# Altium PCB PCB1.PcbDoc
Units mil, origin at the board's own origin, x right, y up, seen from the top; angles counter-clockwise.
Board outline 1000 x 1690.08 mil, 2 copper layers (Top Layer, Bottom Layer); 53 components, 56 nets, 190 pads, 83 vias.
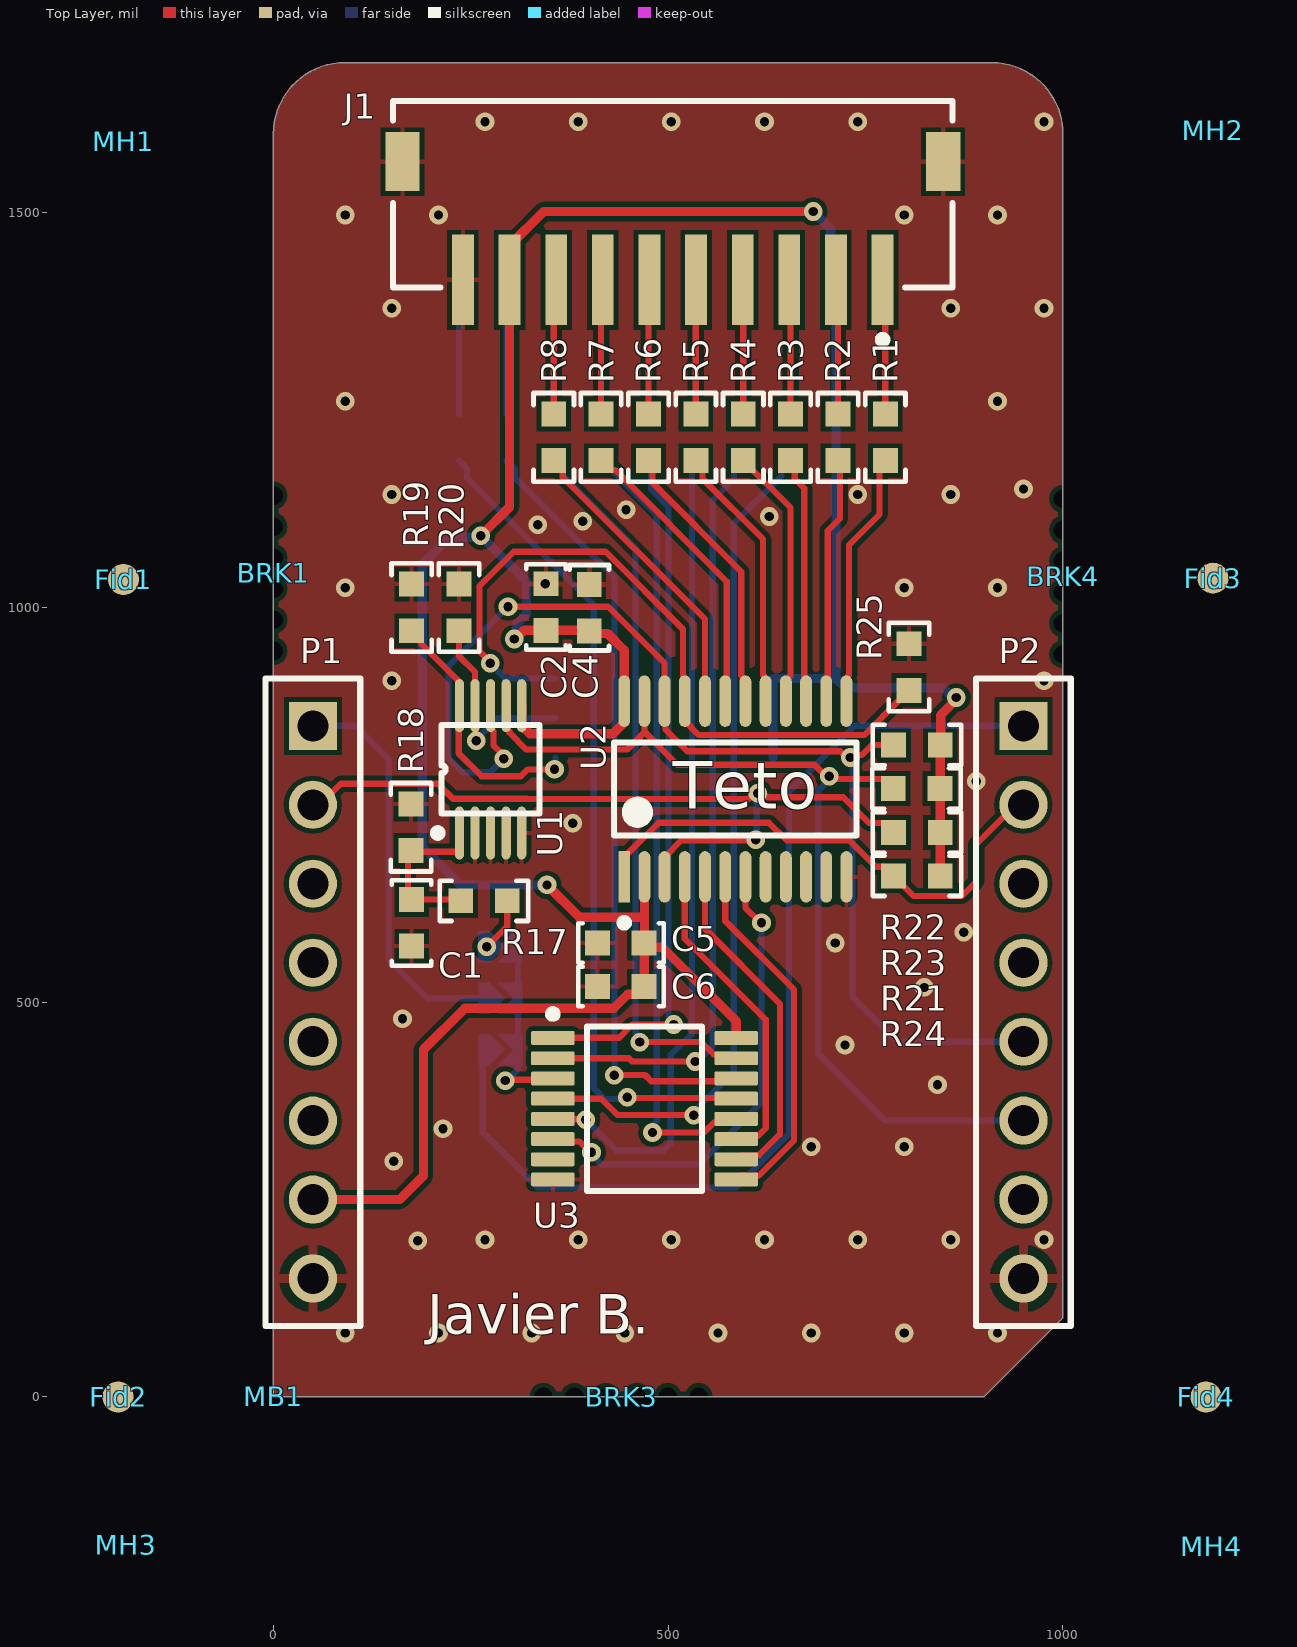
[diagram p0: Top Layer view]
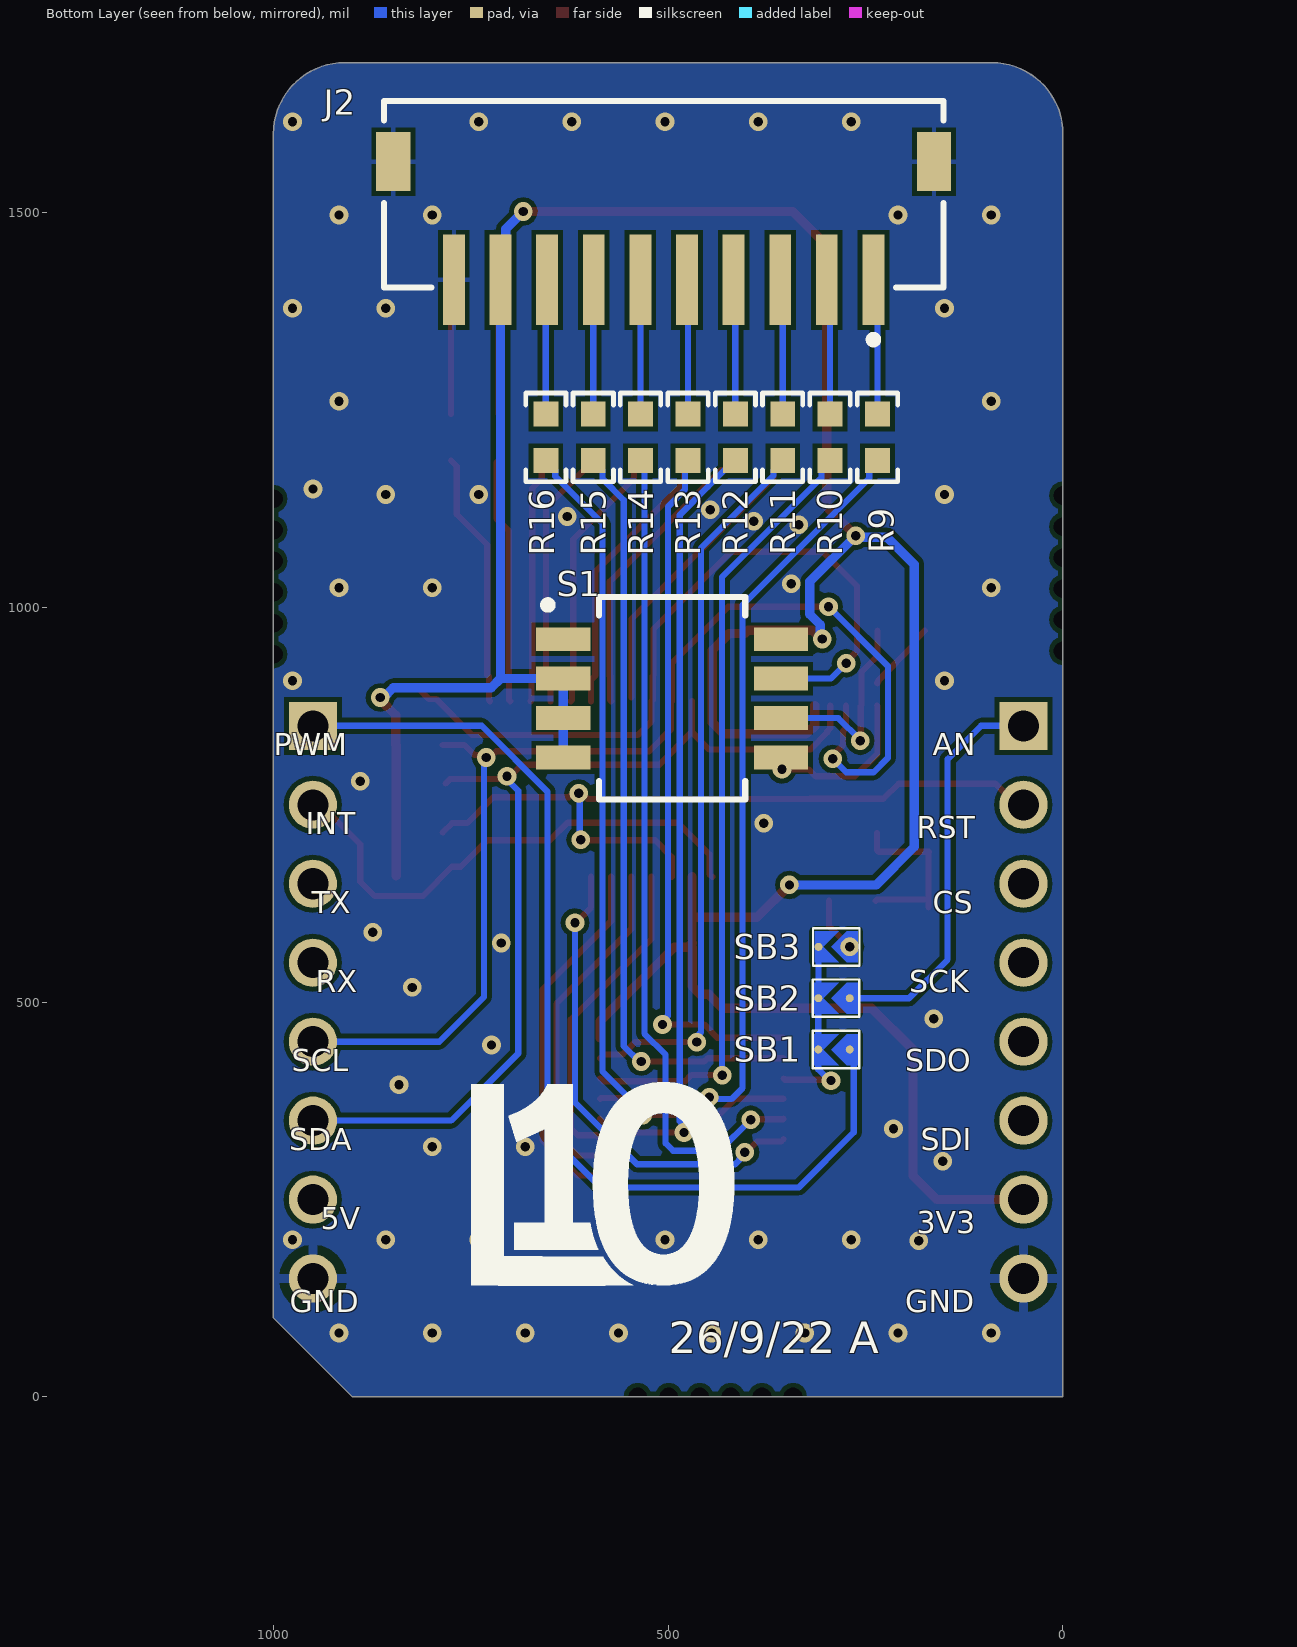
[diagram p1: Bottom Layer view, seen from below]

## Layer stack, top to bottom
Top Solder: solder mask 0.4, Solder Resist, Dk 3.5
Top Layer: signal copper 1.4
Dielectric 1: dielectric 12.6, FR-4, Dk 4.8
Bottom Layer: signal copper 1.4
Bottom Solder: solder mask 0.4, Solder Resist, Dk 3.5

## Board outline
0,0 0,1600 cw(c90.08,1600) 90.08,1690.08 909.92,1690.08 cw(c909.92,1600) 1000,1600 1000,100 900,0

## Design rules (kind name [scope] priority, off if disabled: settings)
BoardOutlineClearance BoardOutlineClearance_silk [OnLayer('Top Overlay')] p1: gap=0 ignorepadtopadclearanceinfootprint=FALSE
BoardOutlineClearance BoardOutlineClearance_silk2 [OnLayer('Bottom Overlay')] p2: gap=0 ignorepadtopadclearanceinfootprint=FALSE
BoardOutlineClearance [All] p3: gap=0 ignorepadtopadclearanceinfootprint=FALSE
Clearance [All] p1: gap=5.91 ignorepadtopadclearanceinfootprint=FALSE
DiffPairsRouting [All] p1: maxlimit=4.92 minlimit=4.92 mostfreqgap=4.92 toplayer_minwidth=4.92 toplayer_maxwidth=4.92 toplayer_prefwidth=4.92 bottomlayer_minwidth=4.92 bottomlayer_maxwidth=4.92 bottomlayer_prefwidth=4.92 maxuncoupledlength=590.55
HoleSize [All] p1: absolutevalues=TRUE maxlimit=196.85 minlimit=7.87 maxpercent=80.000 minpercent=20.000
HoleToHoleClearance [All] p1: gap=11.81 allowstackedmicrovias=TRUE
MinimumSolderMaskSliver [All] p1: minsoldermaskwidth=2.95
PlaneClearance [All] p1: clearance=19.68
PlaneConnect [All] p1: pad.planeconnectstyle=Relief pad.reliefexpansion=20 pad.reliefentries=4 pad.reliefconductorwidth=10 pad.reliefairgap=5.91 via.planeconnectstyle=Direct via.reliefexpansion=20 via.reliefentries=4 via.reliefconductorwidth=10 via.reliefairgap=10
PolygonConnect [All] p1: thpad.connectstyle=Relief thpad.reliefconductorwidth=11.81 thpad.reliefentries=4 thpad.polygonreliefangle="90 Angle" thpad.airgapwidth=11.81 smdpad.connectstyle=Relief smdpad.reliefconductorwidth=5.91 smdpad.reliefentries=4 smdpad.polygonreliefangle="90 Angle" smdpad.airgapwidth=5.91 via.connectstyle=Direct via.reliefconductorwidth=10 via.reliefentries=4 via.polygonreliefangle="90 Angle" via.airgapwidth=10
RoutingVias [All] p1: holewidth=11.81 width=23.62 viastyle="Through Hole" minholewidth=11.81 minwidth=23.62 maxholewidth=27.56 maxwidth=47.24
SilkToSilkClearance [All] p1: silktosilkclearance=0
SilkToSolderMaskClearance [IsPad] p1: minsilkscreentomaskgap=0 clearancetoexposedcopper=TRUE
SolderMaskExpansion [All] p1: expansion=4 istentingtop=FALSE
SupplyNets "Schematic Supply Nets_1" [InNet('GND')] p1: voltage=0.000
SupplyNets "Schematic Supply Nets" [InNet('3v3')] p2: voltage=0.000
Width [All] p1: maxlimit=196.85 minlimit=5.91 preferedwidth=7.87
22 further rules are at their usual default settings.

## Classes and differential pairs
net class S[0..7]: S0 S1 S2 S3 S4 S5 S6 S7
net class "P1 [0..7]": "P1 0" "P1 1" "P1 2" "P1 3" "P1 4" "P1 5" "P1 6" "P1 7"
net class "P0 [0..2]": "P0 0" "P0 1" "P0 2"
component class U_TMUX130: C6 U3
component class U_PCAL64: C4 C5 R21 R22 R23 R24 R25 U2
component class U_MKicroBUS: MB1 P1 P2
component class U_MCP3423: C1 C2 R17 R18 R19 R20 U1
component class U_CONN: J1 J2 R1 R2 R3 R4 R5 R6 R7 R8 R9 R10 R11 R12 R13 R14 R15 R16
component class BUS: BRK1 BRK3 BRK4 Fid1 Fid2 Fid3 Fid4 MH1 MH2 MH3 MH4 S1 SB1 SB2 SB3

## Components (designator, comment, footprint, x,y, rotation, side; value= is the part's Value field where it differs from the comment)
BRK1 "DNP" BK_CRACK1B_M 0,944.88 r270 top value="Mouse Bites 2mm"
BRK3 "DNP" BK_CRACK1B_M 538.74,0 r0 top value="Mouse Bites 2mm"
BRK4 "DNP" BK_CRACK1B_M 1000,1137.48 r90 top value="Mouse Bites 2mm"
C1 "CAP CER 100nF 50V 0603" C_1608[0603] 175,600.47 r270 top value=100nF
C2 "CAP CER 100nF 50V 0603" C_1608[0603] 345,1000.47 r270 top value=100nF
C4 "CAP CER 100nF 50V 0603" C_1608[0603] 400,999.53 r270 top value=100nF
C5 "CAP CER 100nF 50V 0603" C_1608[0603] 440,575 r0 top value=100nF
C6 "CAP CER 100nF 50V 0603" C_1608[0603] 440,520 r0 top value=100nF
Fid1 "DNP" FD_Fiducial -190,1035.49 r0 top value="Fiducial mark"
Fid2 "DNP" FD_Fiducial -196.85,0 r90 top value="Fiducial mark"
Fid3 "DNP" FD_Fiducial 1190,1036.99 r90 top value="Fiducial mark"
Fid4 "DNP" FD_Fiducial 1181.1,0 r90 top value="Fiducial mark"
J1 "HC-ZH-10PWT" J_S10B-ZR-SM4 505.75,1523.27 r180 top locked
J2 "HC-ZH-10PWT" J_S10B-ZR-SM4 505.75,1523.27 r0 bottom
MB1 "mikroBUS" mikroBUS-Midi-No-Connector 0,0 r0 top locked
MH1 "DNP" MP_M-Hole_M2-NonPlated -190,1590 r0 top value="Mounting Hole 2mm non plated"
MH2 "DNP" MP_M-Hole_M2-NonPlated 1190,1604.41 r90 top value="Mounting Hole 2mm non plated"
MH3 "DNP" MP_M-Hole_M2-NonPlated -187.32,-187.46 r90 top value="Mounting Hole 2mm non plated"
MH4 "DNP" MP_M-Hole_M2-NonPlated 1188.03,-189.5 r90 top value="Mounting Hole 2mm non plated"
P1 "ESQ-108-14-T-S" CONN_SKT_01X08_100MIL-ELEVATED-LONGPIN 50,500 r270 top locked
P2 "ESQ-108-14-T-S" CONN_SKT_01X08_100MIL-ELEVATED-LONGPIN 950,500 r270 top locked
R1 "Res 1k 1% 0603" R_1608[0603] 775,1215.47 r270 top value=1k
R2 "Res 1k 1% 0603" R_1608[0603] 715,1215.47 r270 top value=1k
R3 "Res 1k 1% 0603" R_1608[0603] 655,1215.47 r270 top value=1k
R4 "Res 1k 1% 0603" R_1608[0603] 595,1215.47 r270 top value=1k
R5 "Res 1k 1% 0603" R_1608[0603] 535,1215.47 r270 top value=1k
R6 "Res 1k 1% 0603" R_1608[0603] 475,1215.47 r270 top value=1k
R7 "Res 1k 1% 0603" R_1608[0603] 415,1215.47 r270 top value=1k
R8 "Res 1k 1% 0603" R_1608[0603] 355,1215.47 r270 top value=1k
R9 "Res 1k 1% 0603" R_1608[0603] 235,1215.47 r270 bottom value=1k
R10 "Res 1k 1% 0603" R_1608[0603] 295,1215.47 r270 bottom value=1k
R11 "Res 1k 1% 0603" R_1608[0603] 355,1215.47 r270 bottom value=1k
R12 "Res 1k 1% 0603" R_1608[0603] 415,1215.47 r270 bottom value=1k
R13 "Res 1k 1% 0603" R_1608[0603] 475,1215.47 r270 bottom value=1k
R14 "Res 1k 1% 0603" R_1608[0603] 535,1215.47 r270 bottom value=1k
R15 "Res 1k 1% 0603" R_1608[0603] 595,1215.47 r270 bottom value=1k
R16 "Res 1k 1% 0603" R_1608[0603] 655,1215.47 r270 bottom value=1k
R17 "Res 1k 1% 0603" R_1608[0603] 266.65,628.4 r180 top value=1k
R18 "Res 1k 1% 0603" R_1608[0603] 174.08,721.58 r90 top value=1k
R19 "Res 10k 1% 0603" R_1608[0603] 175,1000 r90 top value=10k
R20 "Res 10k 1% 0603" R_1608[0603] 235,1000 r90 top value=10k
R21 "Res 10k 1% 0603" R_1608[0603] 815,715 r180 top value=10k
R22 "Res 10k 1% 0603" R_1608[0603] 815.1,825.71 r180 top value=10k
R23 "Res 10k 1% 0603" R_1608[0603] 814.63,770.71 r180 top value=10k
R24 "Res 10k 1% 0603" R_1608[0603] 815,660 r180 top value=10k
R25 "Res 10k 1% 0603" R_1608[0603] 805,924.53 r90 top value=10k
S1 "DSHP04TSGER" S_DIP_SWITCH_50MIL_4POS 495,885 r270 bottom value="DIP Switch 4pos"
SB1 "Open" SB-TINY-OPEN 290,440 r0 bottom
SB2 "Open" SB-TINY-OPEN 290,505 r0 bottom
SB3 "Open" SB-TINY-OPEN 289.84,570 r0 bottom
U1 "MCP3423-E/UN" U_MSOP50P300X500-10(RM-10)_WO-TP 275,795 r0 top
U2 "PCAL6416APW,118" U_TSSOP24_SOT355-1-IPC_B 585,770 r0 top locked
U3 "TMUX1308PWR" U_TSSOP65P500X450-16 470,365 r270 top locked

## Footprints (in the part's own frame and the unit in brackets; to place one, negate y for a bottom-side part, rotate by r counter-clockwise, add the part's x,y. Pads: shape width x height; smd on the part's side, far side on the other; paste and mask are expansions set on the pad)
BK_CRACK1B_M [mm] "Cracker métrique NPTH"
  round 0 hole 0.6 unplated: 1(0,0) 2(-1,0) 3(-2,0) 4(-3,0) 5(-4,0) 6(-5,0)
C_1608[0603] [mm] "Capacitor MLCC; Body 1.6 x 0.8 mm (LxW typ)"
  rect 0.8x0.8 smd: 1(-0.75,0) 2(0.75,0)
  silkscreen extent -1.38,-0.64 1.38,0.64, body extent -0.8,-0.4 0.8,0.4, height 0.8
CONN_SKT_01X08_100MIL-ELEVATED-LONGPIN [mm] "SQ Post Socket, 1x8 Pins, Vertical, 2.54mm Pitch, Female"
  rect 1.55x1.55 hole 1: 1(-8.89,0)
  round 1.55 hole 1: 2(-6.35,0) 3(-3.81,0) 4(-1.27,0) 5(1.27,0) 6(3.81,0) 7(6.35,0) 8(8.89,0)
  silkscreen extent -10.41,-1.52 10.42,1.52, body extent -10.66,-1.37 10.66,1.37, height 0.25
FD_Fiducial [mm] "Fiducial"
  round 1 smd paste-0.5 mask+1: 1(0,0)
J_S10B-ZR-SM4 [mm] "CONN HEADER SMD 10POS 1MM5 RA"
  rect 0.7x2.9 smd paste+0 mask+0: 1(-6.75,2.75) 2(-5.25,2.75) 3(-3.75,2.75) 4(-2.25,2.75) 5(-0.75,2.75) 6(0.75,2.75) 7(2.25,2.75) 8(3.75,2.75) 9(5.25,2.75) 10(6.75,2.75)
  rect 1.1x1.9 smd paste+0 mask+0: 11(8.7,-1.05) 12(-8.7,-1.05)
  silkscreen extent -9,-3 9,4.8, body extent -9,-3 9,3.5, height 3.7
mikroBUS-Midi-No-Connector [mil]
MP_M-Hole_M2-NonPlated [mm] "Monting Hole M2 non plated"
  round 1.5 hole 2.5 unplated paste-2539.97: 1(0,0)
R_1608[0603] [mm] "Chip Resistor; Body 1.6 x 0.8 mm (LxW typ)"
  rect 0.8x0.8 smd: 1(-0.75,0) 2(0.75,0)
  silkscreen extent -1.43,-0.65 1.43,0.65, body extent -0.77,-0.42 0.78,0.43, height 0.45
S_DIP_SWITCH_50MIL_4POS [mm] "Dip switch 4pos, pitch 1.27mm, height 1.55mm"
  rect 0.76x1.75 smd paste+0 mask+0: 1(-1.903,-3.5) 2(-0.633,-3.5) 3(0.637,-3.5) 4(1.907,-3.5) 5(1.907,3.5) 6(0.637,3.5) 7(-0.633,3.5) 8(-1.903,3.5)
  silkscreen extent -3.25,-4.13 3.26,2.35, body extent -3.15,-3.35 3.16,3.35, height 1.95
SB-TINY-OPEN [mil]
  round 10 smd paste-10 mask+0.04: 1(-19.84,0)
  round 10 smd paste-10.08 mask+0.04: 2(19.84,0)
  Top Layer region: -30.16,-19.68 -30.16,19.68 -15.91,19.68 3.78,0 -15.91,-19.68
  Top Layer region: -6.06,19.68 13.62,0 -6.06,-19.68 24.84,-19.68 24.84,19.68
  silkscreen extent -32,-24 27,24
U_MSOP50P300X500-10(RM-10)_WO-TP [mm] "Shrink Small Outline; 10 Leads; Body Width 3 mm; Pitch 0.5 mm"
  oval 0.3x1.7 smd mask+0.05: 1(-1,-2.05) 2(-0.5,-2.05) 3(0,-2.05) 4(0.5,-2.05) 5(1,-2.05) 6(1,2.05) 7(0.5,2.05) 8(0,2.05) 9(-0.5,2.05) 10(-1,2.05)
  silkscreen extent -1.82,-2.17 1.58,1.43, body extent -1.6,-2.58 1.6,2.57, height 1.09
U_TSSOP24_SOT355-1-IPC_B [mm]
  rect 0.381x1.655 smd paste+0 mask+0: 1(-3.575,-2.825)
  rrect100% 0.381x1.655 smd paste+0 mask+0: 2(-2.925,-2.825) 3(-2.275,-2.825) 4(-1.625,-2.825) 5(-0.975,-2.825) 6(-0.325,-2.825) 7(0.325,-2.825) 8(0.975,-2.825) 9(1.625,-2.825) 10(2.275,-2.825) 11(2.925,-2.825) 12(3.575,-2.825) 13(3.575,2.825) 14(2.925,2.825) 15(2.275,2.825) 16(1.625,2.825) 17(0.975,2.825) 18(0.325,2.825) 19(-0.325,2.825) 20(-0.975,2.825) 21(-1.625,2.825) 22(-2.275,2.825) 23(-2.925,2.825) 24(-3.575,2.825)
  silkscreen extent -3.9,-4.43 3.9,1.5, body extent -4.15,-3.9 4.15,3.9, height 0.25
U_TSSOP65P500X450-16 [mm] "SOP, 16-Leads, Body 5x4.5mm, Pitch 0.65mm, IPC Medium Density"
  rrect22% 0.45x1.4 smd: 1(-2.275,-2.95) 2(-1.625,-2.95) 3(-0.975,-2.95) 4(-0.325,-2.95) 5(0.325,-2.95) 6(0.975,-2.95) 7(1.625,-2.95) 8(2.275,-2.95) 9(2.275,2.95) 10(1.625,2.95) 11(0.975,2.95) 12(0.325,2.95) 13(-0.325,2.95) 14(-0.975,2.95) 15(-1.625,2.95) 16(-2.275,2.95)
  silkscreen extent -3.17,-3.07 2.65,1.85, body extent -3,-4.35 3,4.35, height 0.25

## Part data
BRK1 BRK3 BRK4: library part BK_BREAKOUT_2MM, "Mouse Bites", Mounting Technology=N/A
C1 C2 C4 C5 C6: library part CAP002, "Capacitor type 1", Dielectric=X7R, Manufacturer 1=Yageo, Manufacturer Part Number 1=CC0603KRX7R9BB104, Rated Voltage=50V, Supplier Part Number 1=C14663, Tolerance=10%, Code CEGEP=COND0143SM, LibRef=CAP002, Mounting Technology=SMT, Supplier 1=LCSC
Fid1 Fid2 Fid3 Fid4: library part Fiducial, "Fiducial mark for alignement and Pick&Place", Mounting Technology=N/A
J1 J2: library part CONN-1MM5-01X10-S10B-H-SMT, "CONN wire to board SMT R/A 10POS 1.5mm", Manufacturer 1=HCTL, Manufacturer 2=JST, Manufacturer Part Number 2=S10B-ZR-SM4A-TF(LF)(SN), Supplier Part Number 1=C2845432, Manufacturer Part Number 1=HC-ZH-10PWT, Mounting Technology=SMT, Supplier 1=LCSC, Supplier 2=LCSC, Supplier 3=Digikey, Supplier Part Number 2=C5149249, Supplier Part Number 3=455-1700-1-ND
MB1: library part "mikroBUS compatible add-on board", "mikroBUS compatible add-on board"
MH1 MH2 MH3 MH4: library part MH-2MM_NP, "Mounting Hole 2mm non plated", Supplier Part Number 1=N/A, Manufacturer Part Number 1=DNP, Mounting Technology=N/A
P1 P2: library part CONN-100MIL-SKT-01X08_ELEVATED_LONGPIN, "CONN SOCKET 8pos 100mils Elevated", Manufacturer 1=Samtec, Supplier Part Number 1=SAM9303-ND, Manufacturer Part Number 1=ESQ-108-14-T-S, Mounting Technology=TH, Supplier 1=Digikey
R1 R2 R3 R4 R5 R6 R7 R8 R9 R10 R11 R12 R13 R14 R15 R16 R17 R18: library part RES015, "Resistor type 1", Manufacturer 1=Yageo, Manufacturer Part Number 1=RC0603FR-071KL, Max Working Voltage=75V, Supplier Part Number 1=C22548, Tolerance=1%, LibRef=RES015, Mounting Technology=SMT, Puissance=1/10W, Supplier 1=LCSC
R19 R20 R21 R22 R23 R24 R25: library part RES001, "Resistor type 1", Manufacturer 1=Yageo, Manufacturer Part Number 1=RC0603FR-0710KL, Max Working Voltage=75V, Supplier Part Number 1=C98220, Tolerance=1%, Code CEGEP=RESI0238-0603, LibRef=RES001, Mounting Technology=SMT, Puissance=1/10W, Supplier 1=LCSC
S1: library part SW_DIP_50MIL_4POS, "SWITCH DIP SLIDE SPST 25MA 24V, pitch 1.27mm, height 1.55mm", Manufacturer 1=kangshen, Manufacturer 2=Omron, Manufacturer Part Number 2=A6H-4102-PM, Supplier Part Number 1=C3293144, Manufacturer Part Number 1=DSHP04TSGER, Mounting Technology=SMT, Supplier 1=LCSC, Supplier 2=LCSC, Supplier 3=Digikey, Supplier Part Number 2=C2733274, Supplier Part Number 3=39-A6H-4102-PMCT-ND
SB1 SB2 SB3: library part Solder-Jumper-Open, "Solder Jumper"
U1: library part U_MCP3423-E/UN, "CAN Controller Stand-Alone With SPI, 18-Pin PDIP", Manufacturer 1=Microchip, Supplier Part Number 1=C220864, Manufacturer Part Number 1=MCP3423-E/UN, Mounting Technology=SMT, Supplier 1=LCSC, Supplier 2=Digikey, Supplier Part Number 2=MCP3423-E/UN-ND
U2: library part U_PCAL6416APW, "IC I/O EXPANDER 16BIT 24TSSOP", Manufacturer 1="Texas Instruments", Manufacturer 2="NXP Semiconductors", Manufacturer Part Number 1=TCA6416APWR, Supplier Part Number 1=C130203, Manufacturer Part Number 2=PCAL6416APW,118, Mounting Technology=SMT, Supplier 1=LCSC, Supplier 2=LCSC, Supplier 3=Digikey, Supplier Part Number 2=C2652299, Supplier Part Number 3=568-9922-1-ND
U3: library part U_TMUX1308PWR, "IC MUX 8:1 195OHM 16TSSOP", Manufacturer 1=TI, Supplier Part Number 1=C970231, Manufacturer Part Number 1=TMUX1308PWR, Mounting Technology=SMT, Supplier 1=LCSC, Supplier 2=Digikey, Supplier Part Number 2=296-TMUX1308PWRCT-ND

## Via types
v1: diameter 23.62, hole 11.81, Top Layer to Bottom Layer, tented both sides, 83 vias

## Nets (pads, with @x,y where several pads share a name; then routed paths per layer and width w, separated by ;. In a path a pad name is that pad's centre, name@x,y a point inside that pad or via, vN(x,y) a via of type N, cw(c..) or ccw(c..) an arc to the next point about the centre after c; other vN are vias at no path point)
3v3: C2.2 C4.2 C5.2 C6.2 J1.9 J2.9 P1.7 R21.1 R22.1 R23.1 R24.1 S1.2 S1.3 S1.4 U1.6 U2.2 U2.24 U3.16 | length 4236.4
  Top Layer w11.81: P1.7 160,250 190,280 190,440 242.44,492.44 431.11,492.44 448.83,510.16 459.68,510.16 C6.2 C5.2@469.53,569.68 ; v1(262.6,1090.77) 299.06,1127.23 299.06,1458.31 342.27,1501.52 v1(683.58,1501.52) ; v1(305.04,959.96) 306.46,959.96 317.44,970.94 C2.2 399.06,970.94 402.95,967.05 422.95,967.05 444.25,945.75 U2.24 444.25,854.25 430,840 325,840 318.83,846.17 317.39,846.17 314.35,849.21 U1.6 ; v1(346.49,648.53) 387.49,607.53 469.84,607.53 ; C5.2 474.85,569.68 492.47,569.68 586.14,476.01 U3.16 ; C5.2@469.84,580.31 469.84,607.53 ; U2.2 469.84,607.53 ; R24.1 R21.1 844.53,770.34 R23.1 844.63,771.18 R22.1 845,826.07 845,863.38 864.97,883.35 v1(864.97,885.85)
  Bottom Layer w11.81: v1(305.04,959.96) 307.3,962.22 307.3,977.92 320.59,991.21 320.59,1032.79 v1(262.6,1090.77) 260.77,1088.94 222.74,1088.94 188.28,1054.49 188.28,696.72 236.47,648.53 v1(346.49,648.53) ; S1.4 S1.3 S1.2 712.44,909.92 ; v1(683.58,1501.52) 705.81,1479.29 705.81,1421.63 J2.9 712.44,909.92 ; v1(864.97,885.85) 860.71,885.85 848.37,898.18 724.18,898.18 712.44,909.92
AN: P1.1 SB2.1 | length 511.7
  Bottom Layer w7.87: P1.1 103.7,850 146.07,807.63 146.07,553.93 195,505 SB2.1
GND: C1.2 C2.1 C4.1 C5.1 C6.1 J1.10 J1.11 J1.12 J2.10 J2.11 J2.12 P1.8 P2.8 R18.2 R19.2 R20.2 R25.2 U1.2 U1.3 U1.4 U1.5 U2.12 U3.8
  other v1: 91,81 209,81 327,81 445,81 563,81 681,81 799,81 917,81 182.57,197.77 268,199 386,199 504,199 622,199 740,199 858,199 976,199 152.39,298.6 681,317 799,317 214.65,339.49 841.03,395.39 723.83,445.73 163.47,478.98 824.41,518.69 711.65,575 874.41,588.69 378.93,726.77 890,780 150,907 976,907 91,1025 799,1025 917,1025 344.21,1030.09 334.83,1104.85 391.59,1109.33 627.96,1115.21 446.62,1123.72 150,1143 740,1143 858,1143 950,1150 91,1261 917,1261 150,1379 858,1379 976,1379 91,1497 209,1497 799,1497 917,1497 268,1615 386,1615 504,1615 622,1615 740,1615 976,1615
NetC1_1: C1.1 R17.2 R18.1 U1.1 | length 221.3
  Top Layer w7.87: R18.1@170,690.47 170.47,690 C1.1@170.47,620 ; R18.1@170.47,690.47 233.8,690.47 235.61,692.29 U1.1 ; C1.1 235.52,630 R17.2
NetJ1_1: J1.1 R1.1 | length 171.5
  Top Layer w7.87: J1.1 775,1411.5 R1.1
NetJ1_2: J1.2 R2.1 | length 171.1
  Top Layer w7.87: J1.2 715,1412.44 R2.1
NetJ1_3: J1.3 R3.1 | length 170.7
  Top Layer w7.87: J1.3 655,1413.39 R3.1
NetJ1_4: J1.4 R4.1 | length 170.3
  Top Layer w7.87: J1.4 595,1414.33 R4.1
NetJ1_5: J1.5 R5.1 | length 170.1
  Top Layer w7.87: R5.1 535,1414.72 J1.5
NetJ1_6: J1.6 R6.1 | length 170.5
  Top Layer w7.87: R6.1 475,1413.78 J1.6
NetJ1_7: J1.7 R7.1 | length 170.9
  Top Layer w7.87: R7.1 415,1412.83 J1.7
NetJ1_8: J1.8 R8.1 | length 171.3
  Top Layer w7.87: R8.1 355,1411.89 J1.8
NetJ2_1: J2.1 R9.1 | length 172.1
  Bottom Layer w7.87: R9.1 235,1410 J2.1
NetJ2_2: J2.2 R10.1 | length 228.9
  Bottom Layer w7.87: R10.1 295,1410.94 J2.2 299.06,1458.31 J2.2@308.9,1468.15
NetJ2_3: J2.3 R11.1 | length 171.3
  Bottom Layer w7.87: R11.1 355,1411.89 J2.3
NetJ2_4: J2.4 R12.1 | length 170.9
  Bottom Layer w7.87: R12.1 415,1412.83 J2.4
NetJ2_5: J2.5 R13.1 | length 170.5
  Bottom Layer w7.87: R13.1 475,1413.78 J2.5
NetJ2_6: J2.6 R14.1 | length 170.1
  Bottom Layer w7.87: R14.1 535,1414.72 J2.6
NetJ2_7: J2.7 R15.1 | length 170.3
  Bottom Layer w7.87: J2.7 595,1414.33 R15.1
NetJ2_8: J2.8 R16.1 | length 170.7
  Bottom Layer w7.87: J2.8 655,1413.39 R16.1
NetP1_2: P1.2 R21.2 U2.3 | length 983.2
  Top Layer w7.87: P1.2 58.67,750 85.46,776.79 208.21,776.79 227.41,757.59 274.14,757.59 320.88,757.59 320.94,757.53 602.1,757.53 v1@609.13,764.56 ; U2.3 495.43,683.86 516.58,705 610.13,705 v1(610.88,705.75) ; v1(613.39,764.56) 616.41,761.54 623.85,761.54 625.88,759.52 721.73,759.52 754.44,726.81 773.66,726.81 R21.2
  Bottom Layer w7.87: v1(610.88,705.75) 612.14,707 612.14,763.3 v1(613.39,764.56)
NetP1_3: P1.3
NetP1_4: P1.4
NetP1_5: P1.5
NetP1_6: P1.6
NetP2_2: P2.2 R24.2 U2.1 | length 663
  Top Layer w7.87: U2.1 447.81,662.32 447.81,687.41 487.8,727.4 627.6,727.4 650,705 729.25,705 762.75,671.51 773.97,671.51 811.06,634.41 871.76,634.41 890,652.65 890,700 940,750 P2.2
NetP2_3: P2.3
NetP2_4: P2.4
NetP2_5: P2.5 R22.2 U1.8 U2.22 | length 1548.8
  Top Layer w7.87: U1.8 274.98,847.07 278.61,843.45 278.61,825.38 291.51,812.48 v1(291.51,808.22) ; v1(296.97,1001) 424,1001 495.43,929.57 U2.22 496.47,880.19 496.47,845.63 524.29,817.81 717.93,817.81 725.74,810 732.45,810 735.37,812.92 745.23,812.92 758.02,825.71 R22.2
  Bottom Layer w7.87: v1(291.51,808.22) 274.63,791.35 239.83,791.35 221.6,809.58 221.6,925.78 296.82,1001 v1(296.97,1001) ; v1(730.54,809.9) 733.31,807.13 733.31,506.69 790,450 P2.5
NetP2_6: P2.6 R23.2 U1.7 U2.23 | length 1253.5
  Top Layer w7.87: U1.7 294.67,847.07 298.61,843.14 298.61,841.62 320.22,820 447.77,820 470,842.23 ; U2.23 470,881.08 470,842.23 ; v1(704.14,786.21) 699.88,786.21 685.3,800.79 511.44,800.79 470,842.23 ; v1@704.73,782.52 776.42,782.52 R23.2@781.97,776.97
  Bottom Layer w7.87: v1(704.14,786.21) 704.14,781.95 690,767.81 690,435 775,350 P2.6
NetR17_1: R17.1 SB3.1 | length 69.2
  Top Layer w7.87: v1(270,570) 296.18,596.18 R17.1
NetSB1_2: SB1.2 SB2.2 SB3.2 U3.3 | length 236.7
  Top Layer w7.87: v1@295,400 296.69,401.69 352.17,401.69 U3.3
  Bottom Layer w7.87: v1@295,400 309.84,414.84 SB1.2@309.84,439.88 ; SB3.2 309.68,511.06 309.84,511.22 SB2.2 SB1.2
  other v1: 293.73,400.68
NetU2_7: U2.7 U3.6 | length 607.8
  Top Layer w7.87: U3.6 356.84,323.63 387.11,323.63 400.74,310 v1@405,310 ; U2.7 597.8,619.88 616.95,600.73 v1(618.14,600.73)
  Bottom Layer w7.87: v1@405,310 405,305.74 410,300.74 410,300 415.43,294.57 539.57,294.57 618.14,373.14 v1(618.14,600.73)
  other v1: 402.87,310
"P0 0": U2.4 U3.11 | length 403.9
  Top Layer w7.87: U2.4 521.02,580.43 623.54,477.91 623.54,340.41 614.67,331.54 591.06,331.54 U3.11
"P0 1": U2.5 U3.10 | length 433.8
  Top Layer w7.87: U2.5 546.61,592.68 641.55,497.74 641.55,332.83 614.67,305.95 591.06,305.95 U3.10
"P0 2": U2.6 U3.9 | length 463.6
  Top Layer w7.87: U2.6 572.2,602.8 659.36,515.64 659.36,325.04 614.67,280.35 591.06,280.35 U3.9
"P1 0": R1.2 U2.13 | length 325.1
  Top Layer w7.87: U2.13 727.11,882.6 727.11,912.48 729.12,914.5 729.12,1079.12 767.79,1117.79 767.79,1178.74 R1.2
"P1 1": R2.2 U2.14 | length 312.9
  Top Layer w7.87: U2.14 701.52,882.6 701.52,912.72 702.08,913.28 702.08,1097.08 717.51,1112.51 717.51,1183.44 R2.2
"P1 2": R3.2 U2.15 | length 312.8
  Top Layer w7.87: R3.2 660.26,1180.69 660.26,1163 672.35,1150.91 672.35,913.58 673.21,912.72 673.21,882.6 U2.15
"P1 3": R4.2 U2.16 | length 332
  Top Layer w7.87: R4.2 654.92,1126.03 654.92,914.19 648.98,908.25 U2.16
"P1 4": R5.2 U2.17 | length 341.3
  Top Layer w7.87: R5.2 543.43,1177.51 543.43,1163 620.19,1086.24 620.19,914.5 622.02,912.66 622.02,882.6 U2.17
"P1 5": R6.2 U2.18 | length 355.6
  Top Layer w7.87: R6.2 480.12,1180.82 480.12,1157.61 592.44,1045.3 592.44,913.61 597.8,908.25 U2.18
"P1 6": R7.2 U2.19 | length 374.9
  Top Layer w7.87: R7.2 426.81,1174.13 432.74,1174.13 574.08,1032.8 574.08,913.24 573.57,912.72 573.57,882.6 U2.19
"P1 7": R8.2 U2.20 | length 379.1
  Top Layer w7.87: R8.2 366.53,1174.42 366.53,1165.02 546.61,984.93 U2.20@546.61,886.24
PWM: P2.1 SB1.1 | length 1305.2
  Bottom Layer w7.87: 265,430 265,335 334.74,265.26 585.26,265.26 653.07,333.07 653.07,766.87 736.2,850 P2.1
S0: R9.2 U3.13 | length 1053.5
  Top Layer w7.87: v1(448.15,379.72) 449.12,378.76 585.18,378.76 U3.13
  Bottom Layer w7.87: R9.2 245.28,1175.66 245.28,1163.77 405.79,1003.26 405.79,391.26 419.87,377.19 445.61,377.19 v1(448.15,379.72)
S1: R10.2 U3.14 | length 993.9
  Top Layer w7.87: v1@432.12,407.77 470.6,407.77 478.61,399.76 582.51,399.76 U3.14
  Bottom Layer w7.87: R10.2 305.9,1175.04 305.9,1164.4 432.03,1038.27 v1@432.03,407.68
  other v1: 431.68,407.32
S2: R11.2 U3.15 | length 912.4
  Top Layer w7.87: v1(463.76,449.45) 542.07,449.45 557.62,433.9 581.22,433.9 U3.15
  Bottom Layer w7.87: R11.2 366.81,1174.13 366.81,1167.06 458.66,1075.22 458.66,461.93 460.75,459.84 460.75,452.46 v1(463.76,449.45)
S3: R12.2 U3.12 | length 996.7
  Top Layer w7.87: v1(480,335) 545.33,335 557.62,347.28 581.22,347.28 U3.12
  Bottom Layer w7.87: R12.2 426.81,1174.13 428.48,1174.13 449.66,1152.95 485.52,1117.09 485.52,349.12 483.01,346.61 483.01,338.01 v1(480,335)
S4: R13.2 U3.1 | length 887.3
  Top Layer w7.87: U3.1@354.32,455.03 437.89,455.03 454.61,471.75 v1(507.18,471.75)
  Bottom Layer w7.87: R13.2 478.63,1182.32 478.63,1149.42 500.28,1127.77 500.28,482.91 507.18,476.01 v1(507.18,471.75)
S5: R14.2 U3.5 | length 1048
  Top Layer w7.87: U3.5 354.41,351.65 395.1,351.65 v1(395.65,351.1)
  Bottom Layer w7.87: v1(395.65,351.1) 435.02,311.73 493.8,311.73 503.33,321.26 503.33,433.33 530.19,460.19 530.19,1181.13 R14.2
S6: R15.2 U3.2 | length 969.8
  Top Layer w7.87: U3.2 450.16,428.98 454.27,424.87 v1(534.21,424.87)
  Bottom Layer w7.87: v1(534.21,424.87) 536.82,424.87 556.37,444.43 556.37,1135.93 583.26,1162.82 583.26,1174.2 R15.2
S7: R16.2 U3.4 | length 1066.8
  Top Layer w7.87: U3.4 415.11,377.8 435.88,357.03 v1@531.86,357.03
  Bottom Layer w7.87: v1(532.23,356.65) 532.23,360.91 538.82,367.5 538.82,367.73 583.12,412.02 583.12,1106.19 643.19,1166.27 643.19,1174.13 R16.2
SW1: R25.1 S1.7 U2.21 | length 952.8
  Top Layer w7.87: v1(274.51,929.31) 274.51,931.15 260.83,944.83 260.83,1026.99 304.31,1070.47 420.62,1070.47 518.71,972.39 518.71,913.67 519.66,912.72 519.66,882.6 U2.21 521.02,856.14 538.81,838.35 748.35,838.35 794.01,884.01 803.54,884.01 R25.1@815,895.47
  Bottom Layer w7.87: v1(274.51,929.31) 293.89,909.92 S1.7
SW2: R20.1 S1.6 U1.9 | length 261.4
  Top Layer w7.87: R20.1 235,938.19 255.3,917.89 U1.9 256.05,874.95 256.05,831.96 v1(256.95,831.06)
  Bottom Layer w7.87: v1(256.95,831.06) 256.95,832.19 284.69,859.92 S1.6
SW3: R19.1 S1.5 U1.10 | length 305.8
  Top Layer w7.87: R19.1 186.81,958.66 186.81,954.51 233.65,907.67 233.65,906.29 235.61,904.32 U1.10@234.86,903.57 ; U1.10 234.86,874.95 234.86,844.6 234.74,844.49 234.74,815 263.66,786.08 313.46,786.08 322.26,794.88 v1(355.93,794.88)
  Bottom Layer w7.87: v1(355.93,794.88) 357.2,796.15 S1.5
pads on no net: BRK1.1 BRK1.2 BRK1.3 BRK1.4 BRK1.5 BRK1.6 BRK3.1 BRK3.2 BRK3.3 BRK3.4 BRK3.5 BRK3.6 BRK4.1 BRK4.2 BRK4.3 BRK4.4 BRK4.5 BRK4.6 Fid1.1 Fid2.1 Fid3.1 Fid4.1 MH1.1 MH2.1 MH3.1 MH4.1 P2.7 S1.1 S1.8 U2.8 U2.9 U2.10 U2.11 U3.7

## Polygon pours and split planes (outlines as drawn)
GND on Top Layer "GND_L01_P000" (solid, remove dead copper, pour order 0): 0,0 0,1600 cw(c90.08,1600) 90.08,1690.08 909.92,1690.08 cw(c909.92,1600) 1000,1600 1000,100 900,0
GND on Bottom Layer "GND_L02_P001" (solid, remove dead copper, pour order 1): 0,0 0,1600 cw(c90.08,1600) 90.08,1690.08 909.92,1690.08 cw(c909.92,1600) 1000,1600 1000,100 900,0

## Silkscreen, mask and mechanical layers (free items; w line width, h text height)
Top Overlay:
  text "Teto" at 505.44,744.9 h60
  text "Javier B." at 195,80 h50
Bottom Overlay:
  drawing of 3 lines, arcs and shapes, not listed
  text "26/9/22 A" at 499.05,55.21 h40
Mechanical 2:
  lines w10: -78.69,940.63 -78.69,-78.69 341.89,-78.69 ; -78.69,1137.48 -78.69,1484.14 -78.69,1692.91 -287.47,1692.91 -287.47,0 ; 538.74,-78.69 1078.69,-78.69 1078.69,940.63 ; 1078.69,1137.48 1078.69,1484.05 1078.69,1692.91 1287.55,1692.91 1287.55,-287.45 -287.45,-287.45 -287.45,0 ; -287.47,0 -287.45,0 ; 0,0 0,1600 cw(c90.08,1600) 90.08,1690.08 909.92,1690.08 cw(c909.92,1600) 1000,1600 1000,100 900,0 0,0

## Text inside footprints (layer, text, board x,y; h text height)
MB1: Bottom Overlay "AN" at 165,803 h47.24; Bottom Overlay "SDA" at 979.91,303 h47.24; Bottom Overlay "RST" at 185,698 h47.24; Bottom Overlay "3V3" at 185,198 h47.24; Bottom Overlay "PWM" at 999.89,803 h47.24; Bottom Overlay "SCL" at 976.78,403 h47.24; Bottom Overlay "GND" at 200,98 h47.24; Bottom Overlay "SDI" at 180,303 h47.24; Bottom Overlay "INT" at 958.94,703 h47.24; Bottom Overlay "GND" at 979.26,98 h47.24; Bottom Overlay "RX" at 946.55,503 h47.24; Bottom Overlay "SCK" at 195,503 h47.24; Bottom Overlay "TX" at 951.55,603 h47.24; Bottom Overlay "5V" at 940,203 h47.24; Bottom Overlay "SDO" at 200,403 h47.24; Bottom Overlay "CS" at 165,603 h47.24